# Altium PCB Cartridge PCB.PcbDoc
Units mm, origin at the board's own origin, x right, y up, seen from the top; angles counter-clockwise.
Board outline 13.02 x 29.51 mm, 2 copper layers (Component Side, Bottom Layer), stack 0.98 mm thick; 10 components, 5 nets, 24 pads, 2 vias.
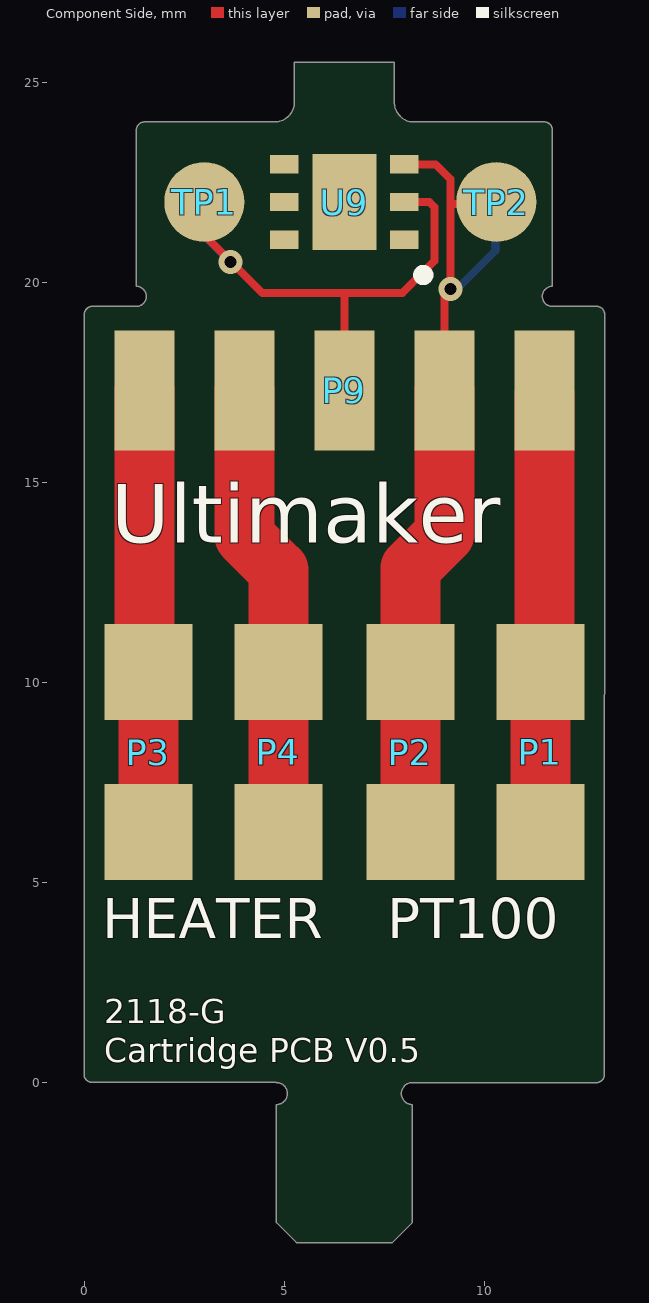
[diagram p0: Component Side view]
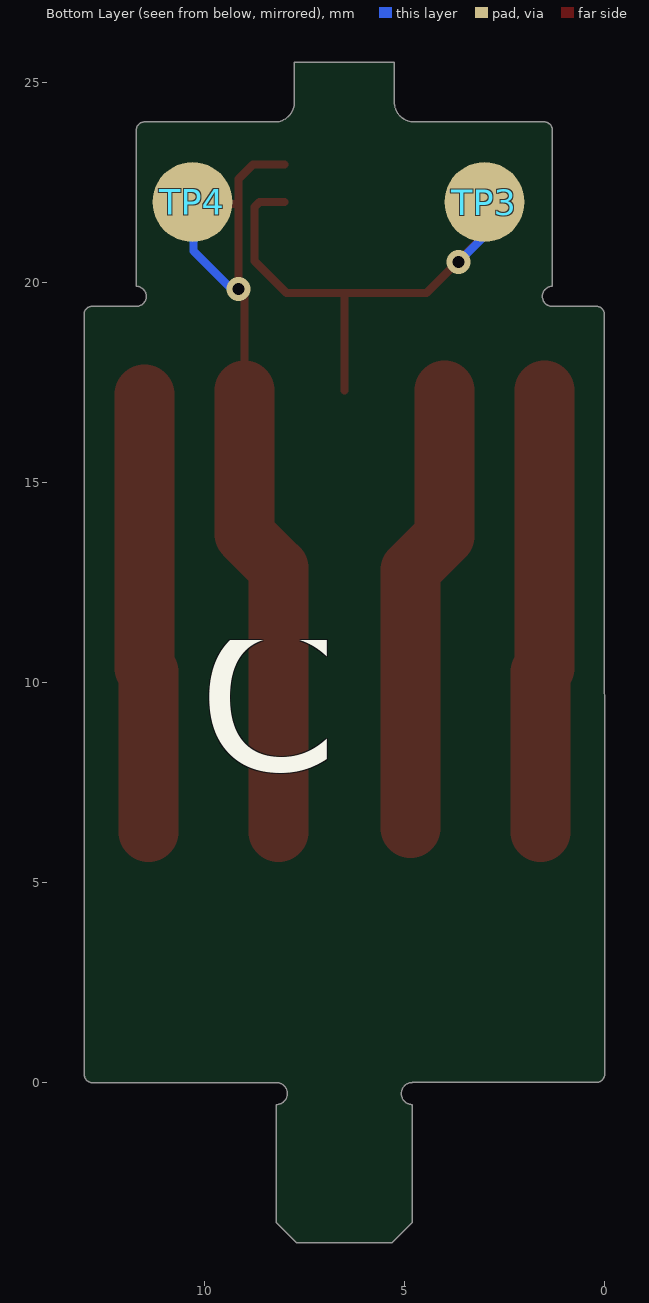
[diagram p1: Bottom Layer view, seen from below]

## Layer stack, top to bottom
Top Solder: solder mask 0.0102, Solder Resist, Dk 3.5
Component Side: signal copper 0.0356
Dielectric 1: core 0.9086, FR-4, Dk 4.2
Bottom Layer: signal copper 0.0356
Solder Side: solder mask 0.0102, Solder Resist, Dk 3.5

## Board outline
4.803,-3.513 4.803,-0.563 ccw(c4.803,-0.288) 4.803,-0.013 4.803,-0.008 0.194,-0.006 cw(c0.194,0.194) -0.006,0.194 0.001,19.192 cw(c0.201,19.192) 0.201,19.392 1.303,19.392 ccw(c1.303,19.642) 1.303,19.892 1.303,23.803 cw(c1.503,23.803) 1.503,24.003 4.799,24.003 ccw(c4.753,24.5) 5.253,24.5 5.253,25.5 7.753,25.5 7.753,24.497 ccw(c8.253,24.497) 8.175,24.003 11.503,24.003 cw(c11.503,23.803) 11.703,23.803 11.703,19.892 ccw(c11.703,19.642) 11.703,19.392 12.81,19.392 cw(c12.81,19.192) 13.01,19.192 13.003,0.186 cw(c12.803,0.186) 12.803,-0.014 8.203,-0.013 ccw(c8.203,-0.288) 8.203,-0.563 8.203,-3.513 7.703,-4.013 5.303,-4.013

## Design rules (kind name [scope] priority, off if disabled: settings)
Clearance Fiducials [(InComponent('Fid1'))or (InComponent('Fid2'))or  (InComponent('Fid3'))] p1: gap=0.762
Clearance Outline_clearance [InPolygon vs OnLayer('Keep-Out Layer')] p2: gap=0.4
Clearance [All] p3: gap=0.2
MinimumSolderMaskSliver [All] p1: minsoldermaskwidth=0.051
PolygonConnect [All] p1: connectstyle=Relief reliefconductorwidth=0.254 reliefentries=4 polygonreliefangle="90 Angle" airgapwidth=0.254
RoutingVias [All] p1: holewidth=0.711 width=1.27 viastyle="Through Hole" minholewidth=0.3 minwidth=0.7 maxholewidth=0.711 maxwidth=1.27
SolderMaskExpansion [All] p1: expansion=0.102
Width [All] p1: maxlimit=4 minlimit=0.2 preferedwidth=0.2
29 further rules are at their usual default settings.

## Components (designator, comment, footprint, x,y, rotation, side; value= is the part's Value field where it differs from the comment)
P1 "PT100" "AVX POKE HOME CONTACT 2MM" 11.4,8.25 r90 top locked
P2 "GND" "AVX POKE HOME CONTACT 2MM" 8.15,8.25 r90 top locked
P3 "HEATER_P" "AVX POKE HOME CONTACT 2MM" 1.6,8.25 r90 top locked
P4 "HEATER_N" "AVX POKE HOME CONTACT 2MM" 4.85,8.25 r90 top locked
P9 "Hard gold plated contacts" "MATING CONTACTS" 6.5,17.29 r0 top locked
TP1 "2mm" "TESTPOINT 2mm" 3,22 r0 top
TP2 "2mm" "TESTPOINT 2mm" 10.3,22 r90 top
TP3 "2mm" "TESTPOINT 2mm" 3,22 r90 bottom
TP4 "2mm" "TESTPOINT 2mm" 10.3,22 r90 bottom
U9 "DS2431" TDFN-6 6.5,22 r180 top locked

## Footprints (in the part's own frame and the unit in brackets; to place one, negate y for a bottom-side part, rotate by r counter-clockwise, add the part's x,y. Pads: shape width x height; smd on the part's side, far side on the other; paste and mask are expansions set on the pad)
"AVX POKE HOME CONTACT 2MM" [mm] "709296001002006"
  rect 2.4x2.2 smd: 1(-2,0) 1(2,0)
  body extent -3,-1 3,1, height 2
"MATING CONTACTS" [mm] "Mating contacts to Printhead PCB"
  rect 1.5x3 smd paste-20: 1(5,0) 2(2.5,0) 3(0,0) 4(-2.5,0) 5(-5,0)
  body extent -5.75,-1.5 5.75,1.5, height 0.1
TDFN-6 [mm] "DS2431 1-Wire Eeprom"
  rect 1.6x2.39 smd: 0(0,0)
  rect 0.71x0.46 smd: 1(-1.5,0.94) 2(-1.5,0) 3(-1.5,-0.94) 4(1.5,-0.94) 5(1.5,0) 6(1.5,0.94)
  silkscreen extent -2.1,1.7 -1.85,1.95, body extent -1.5,-1.5 1.5,1.5, height 0.8
"TESTPOINT 2mm" [mm] "TESTPOINT 2mm"
  round 2 smd paste-2 mask+0: 1(0,0)

## Part data
P1 P2 P3 P4: library part Plug, "Plug"
P9: library part "Header 5", "Header, 5-Pin"
TP1 TP2 TP3 TP4: "Testpoint, 2mm, round"
U9: library part Component_1

## Via types
v1: diameter 0.6, hole 0.3, Component Side to Bottom Layer, 1 vias
v2: diameter 0.6, hole 0.3, Component Side to Bottom Layer, tented both sides, 1 vias

## Nets (pads, with @x,y where several pads share a name; then routed paths per layer and width w, separated by ;. In a path a pad name is that pad's centre, name@x,y a point inside that pad or via, vN(x,y) a via of type N, cw(c..) or ccw(c..) an arc to the next point about the centre after c; other vN are vias at no path point)
GND: P2.1 P9.2 TP2.1 TP4.1 U9.3 | length 22
  Component Side w0.2: U9.3 8.785,22.94 9.15,22.575 9.15,21.95 ; P9.2 9,19.675 v1(9.15,19.825) 9.15,21.95 ; TP2.1 10.25,21.95 9.15,21.95
  Component Side w1.5: P2.1@8.15,6.25 8.15,10.25 8.15,12.85 9,13.7 P9.2
  Bottom Layer w0.2: v1(9.15,19.825) 9.325,19.825 10.275,20.775 10.275,21.85 TP4.1@10.125,22
HEATER1_N: P4.1 P9.4 | length 11.3
  Component Side w1.5: P9.4 4,13.65 4.85,12.8 4.85,10.25 P4.1@4.85,6.35
HEATER1_P: P3.1 P9.5 | length 11.1
  Component Side w1.5: P9.5 1.5,10.35 1.6,10.25 P3.1@1.6,6.25
NetP9_3: P9.3 TP1.1 TP3.1 U9.2 | length 13.9
  Component Side w0.2: TP1.1 3,21.175 4.45,19.725 6.5,19.725 ; P9.3 6.5,19.725 ; U9.2 8.625,22 8.75,21.875 8.75,20.525 7.95,19.725 6.5,19.725
  Bottom Layer w0.2: TP3.1 3,21.15 v2(3.65,20.5)
PT100: P1.1 P9.1 | length 10.8
  Component Side w1.5: P1.1@11.4,6.25 P1.1@11.4,10.25 ; P1.1@11.5,10.35 P9.1@11.5,17.19
pads on no net: U9.0 U9.1 U9.4 U9.5 U9.6

## Silkscreen, mask and mechanical layers (free items; w line width, h text height)
Top Overlay:
  text "Ultimaker" at 0.675,13 h2.5
  text "HEATER" at 0.45,3.6 h1
  text "PT100" at 7.575,3.6 h1
  text "2118-G" at 0.5,1.475 h0.6
  text "Cartridge PCB V0.5" at 0.5,0.5 h0.6
Bottom Overlay:
  text "C" at 10.15,5.9 h10
Board Outline:
  the board outline again, w0.001